# Altium PCB Hydrophone_preamplifier_V2.PcbDoc
Units mil, origin at the board's own origin, x right, y up, seen from the top; angles counter-clockwise.
Board outline 2834.65 x 2755.91 mil, 2 copper layers (Top Layer, Bottom Layer); 118 components, 68 nets, 314 pads, 274 vias.
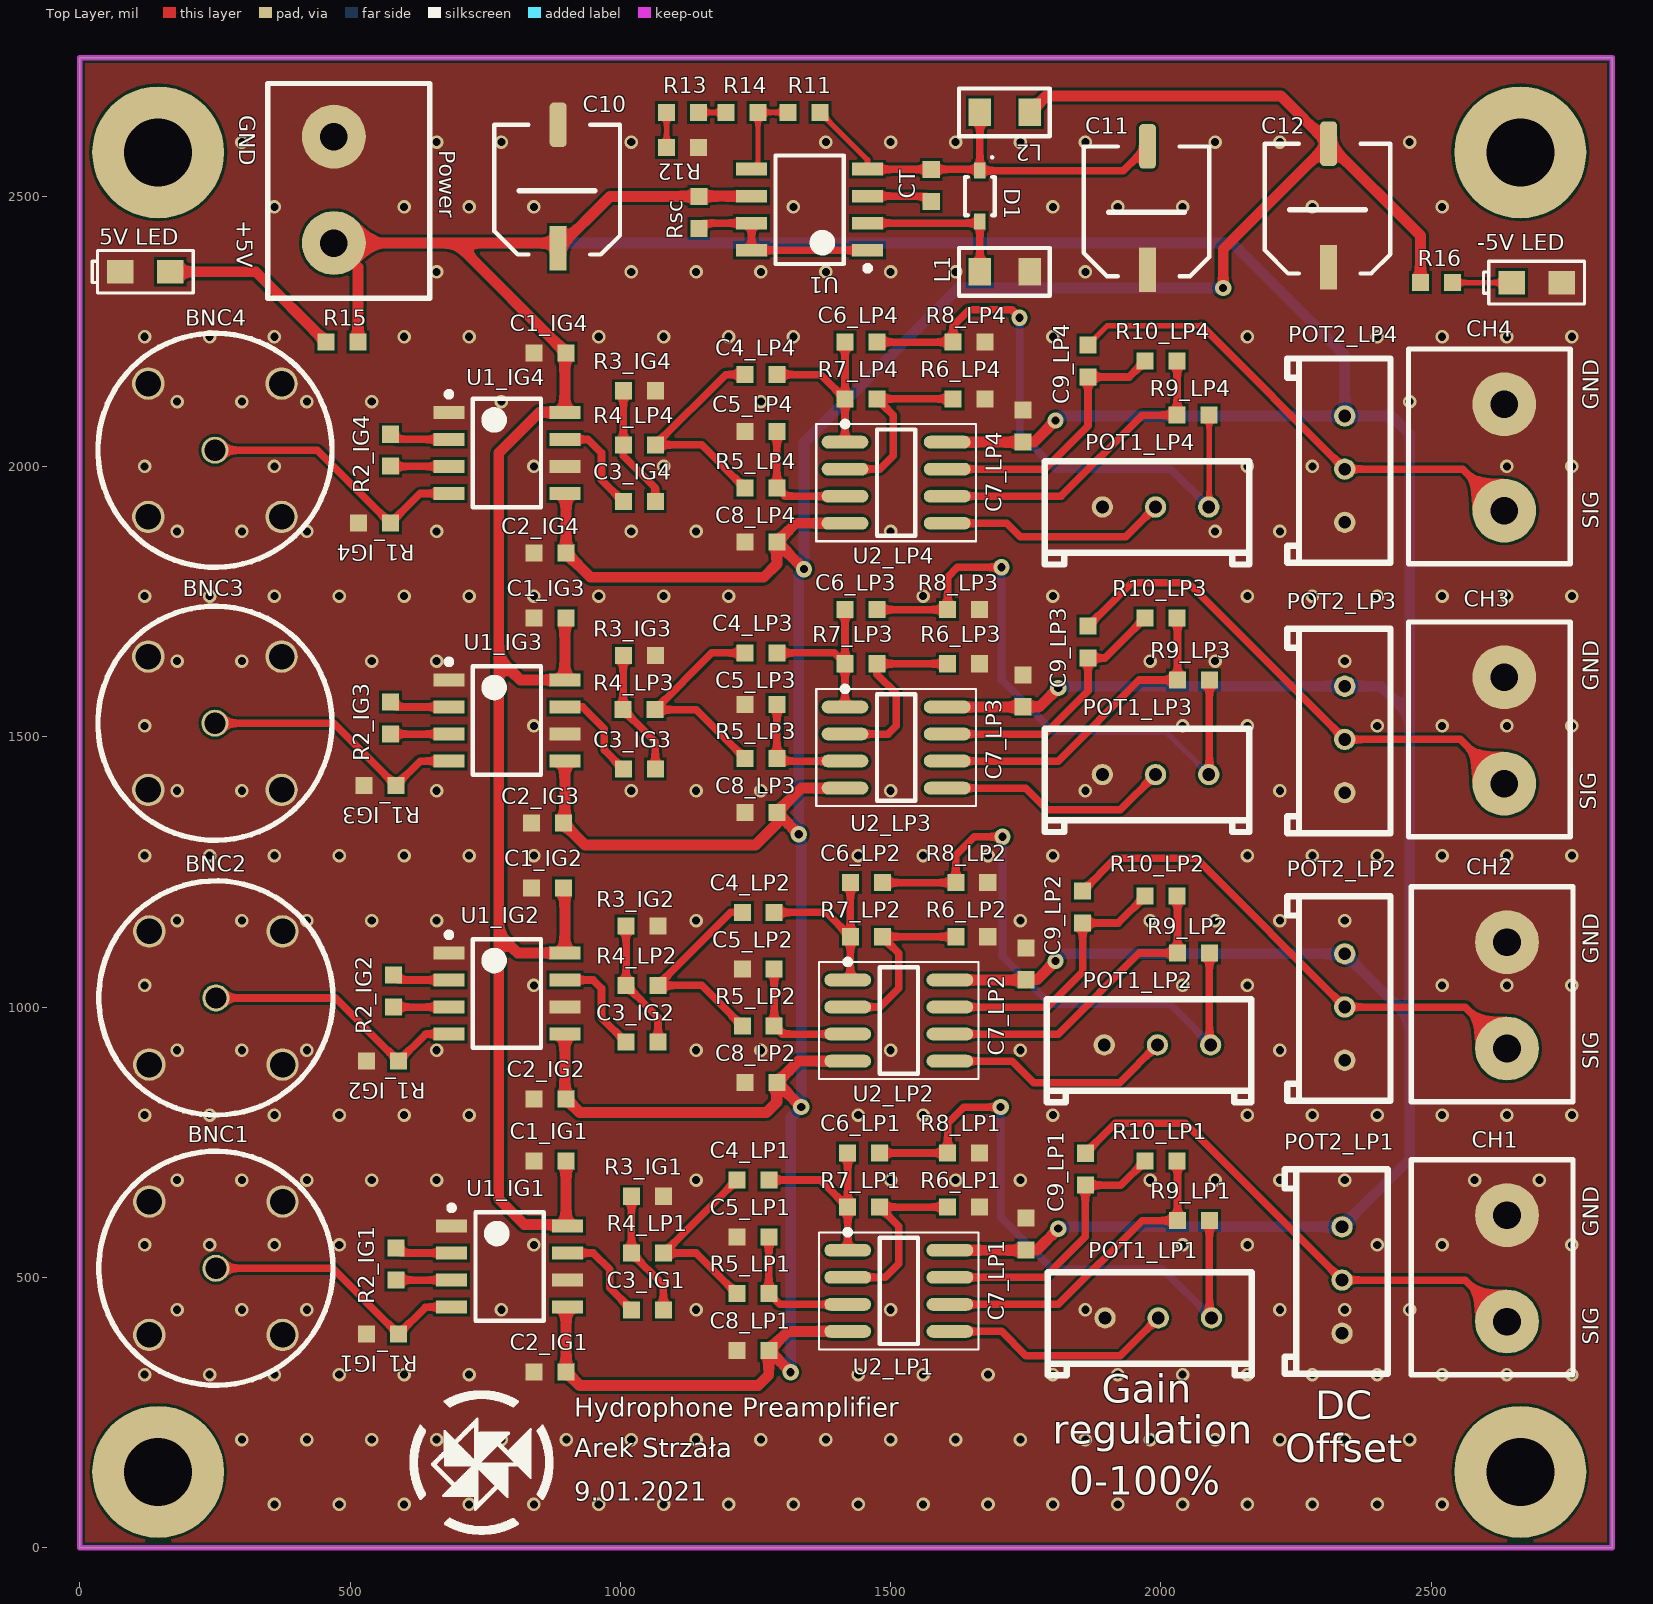
[diagram p0: Top Layer view]
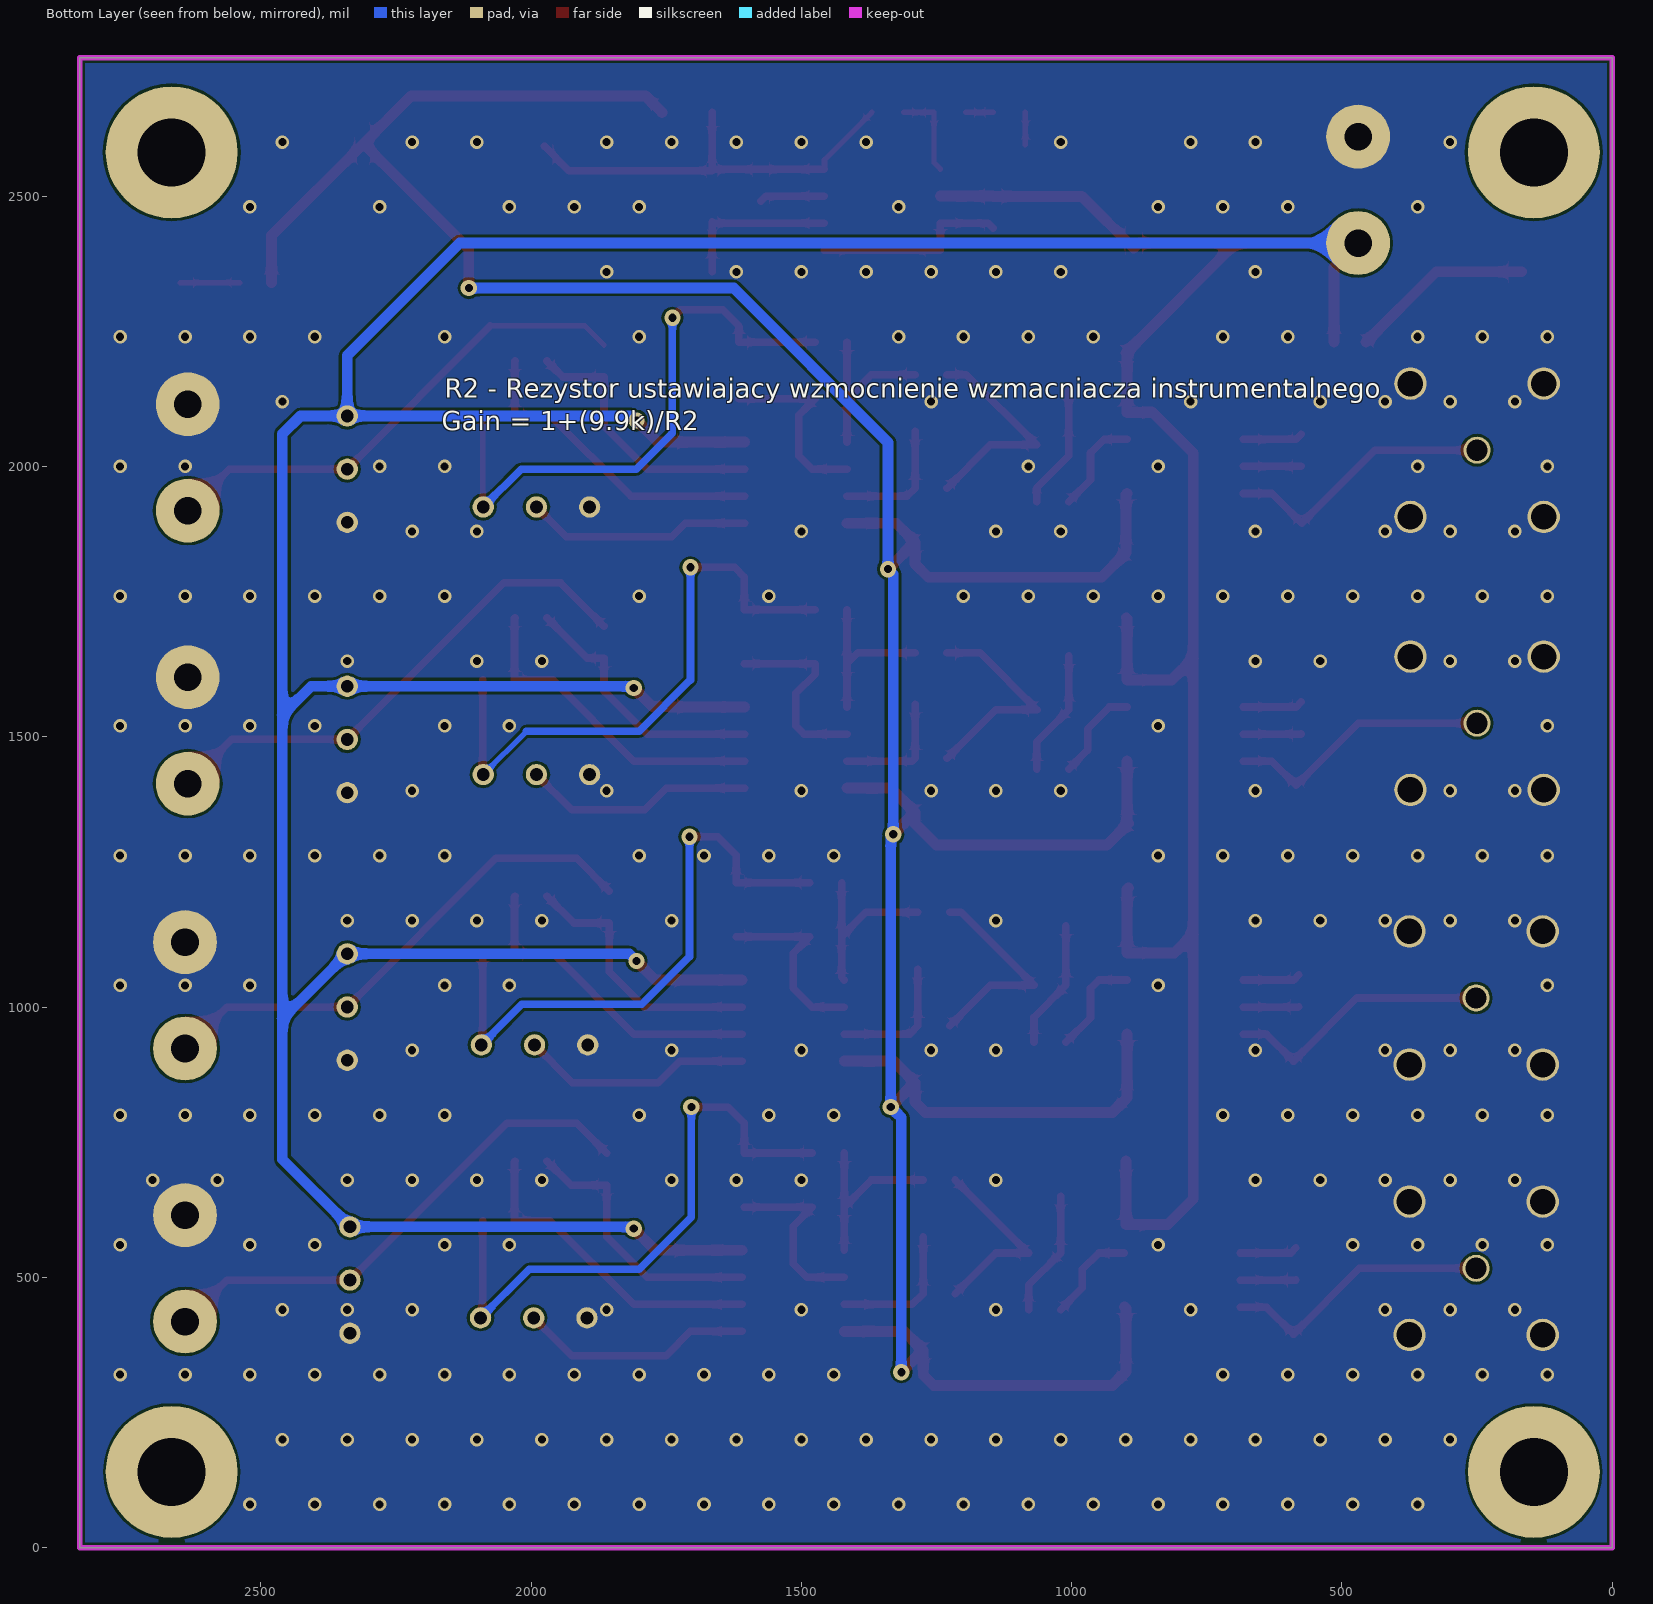
[diagram p1: Bottom Layer view, seen from below]
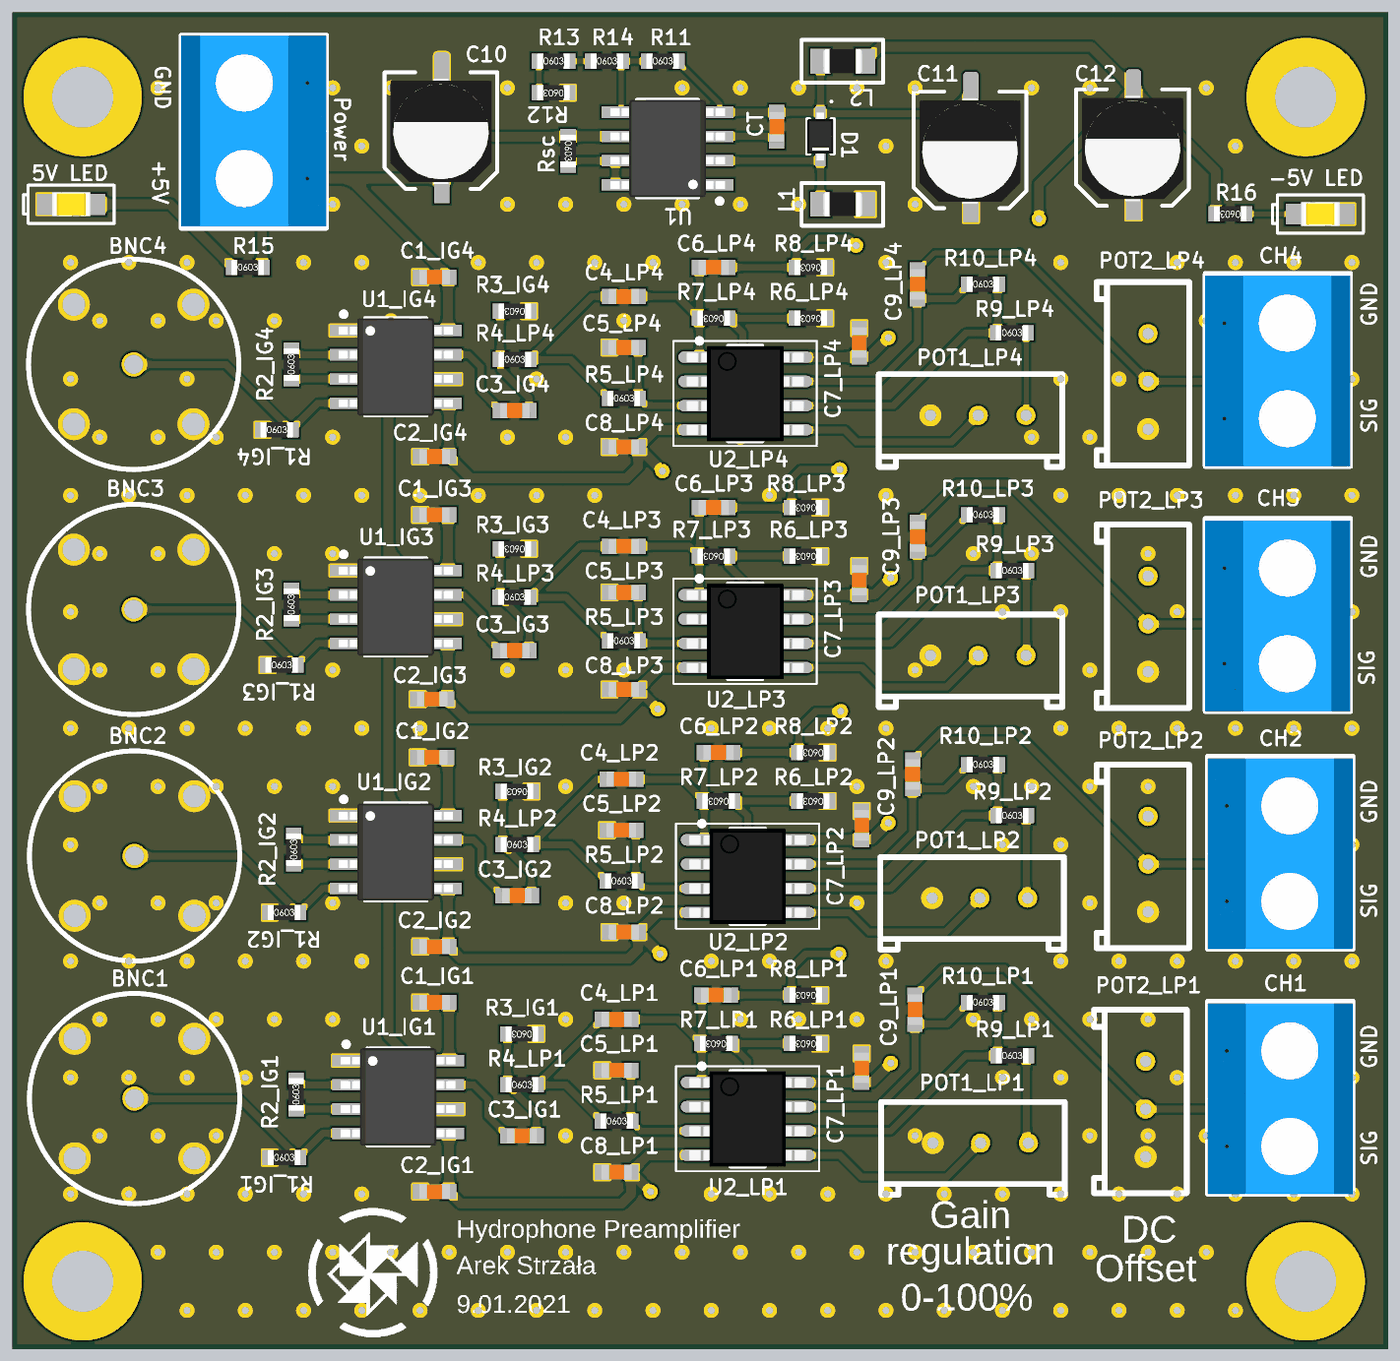
[diagram p2: 3D render of the assembled board from above, using the file's embedded part models]

## Layer stack, top to bottom
Top Solder: solder mask 0.4, Solder Resist, Dk 3.5
Top Layer: signal copper 1.4
Dielectric 1: dielectric 12.6, FR-4, Dk 4.8
Bottom Layer: signal copper 1.4
Bottom Solder: solder mask 0.4, Solder Resist, Dk 3.5

## Board outline
0,0 0,2755.91 2834.65,2755.91 2834.65,0

## Design rules (kind name [scope] priority, off if disabled: settings)
BoardOutlineClearance [All] p1: gap=7.87 ignorepadtopadclearanceinfootprint=FALSE
Clearance [All] p1: gap=5 ignorepadtopadclearanceinfootprint=FALSE except(9.84: Arc-Hole Track-Hole SMDPad-Hole THPad-Hole Via-Hole Fill-Hole Poly-Hole Region-Hole Text-Hole)
ComponentClearance [All] p1: gap=5 collisioncheckmode=3 verticalgap=5 showdistances=TRUE
DiffPairsRouting [All] p1: maxlimit=10 minlimit=5 mostfreqgap=5 toplayer_minwidth=5 toplayer_maxwidth=1000 toplayer_prefwidth=5 bottomlayer_minwidth=5 bottomlayer_maxwidth=1000 bottomlayer_prefwidth=5 maxuncoupledlength=500
Height [All] p1: minheight=0 maxheight=71497.94 prefheight=500
HoleSize [All] p1: absolutevalues=TRUE maxlimit=248.03 minlimit=11.81 maxpercent=80.000 minpercent=20.000
HoleToHoleClearance [All] p1: gap=9.84 allowstackedmicrovias=FALSE
MinimumAnnularRing [All] p1: minimumring=3
MinimumSolderMaskSliver [All] p1: minsoldermaskwidth=0
PlaneClearance [All] p1: clearance=5
PlaneConnect PlaneConnectPowerPads [InPadClass('PowerPads')] p1: planeconnectstyle=Direct reliefexpansion=20 reliefentries=4 reliefconductorwidth=10 reliefairgap=10
PlaneConnect [All] p2: pad.planeconnectstyle=Relief pad.reliefexpansion=11.81 pad.reliefentries=4 pad.reliefconductorwidth=5 pad.reliefairgap=5 via.planeconnectstyle=Direct via.reliefexpansion=11.81 via.reliefentries=4 via.reliefconductorwidth=5 via.reliefairgap=5
PolygonConnect "direct connect" [All vs IsNamedPolygon('GND_L02_P008')] p1: connectstyle=Direct reliefconductorwidth=10 reliefentries=4 polygonreliefangle="90 Angle" airgapwidth=10
PolygonConnect "direct contact_3" [All vs IsNamedPolygon('GND_L01_P007')] p2: connectstyle=Direct reliefconductorwidth=10 reliefentries=4 polygonreliefangle="90 Angle" airgapwidth=10
PolygonConnect "direct contact_2" [All vs IsNamedPolygon('TOP Layer-GND1')] p3: connectstyle=Direct reliefconductorwidth=10 reliefentries=4 polygonreliefangle="90 Angle" airgapwidth=10
PolygonConnect "direct contact_1" [All vs IsNamedPolygon('TOP Layer-GND1')] p4: thpad.connectstyle=NoConnect thpad.reliefconductorwidth=10 thpad.reliefentries=4 thpad.polygonreliefangle="90 Angle" thpad.airgapwidth=10 smdpad.connectstyle=Direct smdpad.reliefconductorwidth=10 smdpad.reliefentries=4 smdpad.polygonreliefangle="90 Angle" smdpad.airgapwidth=10 via.connectstyle=Direct via.reliefconductorwidth=10 via.reliefentries=4 via.polygonreliefangle="90 Angle" via.airgapwidth=10
PolygonConnect "direct contact" [All vs IsNamedPolygon('Bottom Layer-GND')] p5: connectstyle=Direct reliefconductorwidth=10 reliefentries=4 polygonreliefangle="90 Angle" airgapwidth=10
PolygonConnect PolygonConnectPowerPads [All vs (InPadClass('PowerPads'))] p6: connectstyle=Direct reliefconductorwidth=10 reliefentries=4 polygonreliefangle="90 Angle" airgapwidth=10
PolygonConnect [All] p7: thpad.connectstyle=Relief thpad.reliefconductorwidth=5 thpad.reliefentries=4 thpad.polygonreliefangle="90 Angle" thpad.airgapwidth=5 smdpad.connectstyle=Relief smdpad.reliefconductorwidth=5 smdpad.reliefentries=4 smdpad.polygonreliefangle="90 Angle" smdpad.airgapwidth=5 via.connectstyle=Direct via.reliefconductorwidth=5 via.reliefentries=4 via.polygonreliefangle="90 Angle" via.airgapwidth=5
RoutingVias [All] p1: holewidth=11.81 width=23.62 viastyle="Through Hole" minholewidth=11.81 minwidth=23.62 maxholewidth=23.62 maxwidth=259.84
SilkToSilkClearance [All] p1: silktosilkclearance=0
SilkToSolderMaskClearance [IsPad] p1: minsilkscreentomaskgap=5 clearancetoexposedcopper=TRUE
SolderMaskExpansion [All] p1: expansion=2.95
Width [All] p1: maxlimit=1000 minlimit=5 preferedwidth=5 minimp=50.000000 maximp=50.000000 favimp=50.000000
20 further rules are at their usual default settings.

## Classes and differential pairs
channel class Low_Pass_48kHz: LP1 LP2 LP3 LP4
channel class Input_Gain: IG1 IG2 IG3 IG4
channel class Channel: preamp1 preamp2 preamp3 preamp4
component class "Symetric power": "5V LED" "-5V LED" C10 C11 C12 CT D1 L1 L2 R11 R12 R13 R14 R15 R16 Rsc U1
component class LP4: C4_LP4 C5_LP4 C6_LP4 C7_LP4 C8_LP4 C9_LP4 POT1_LP4 POT2_LP4 R4_LP4 R5_LP4 R6_LP4 R7_LP4 R8_LP4 R9_LP4 R10_LP4 U2_LP4
component class LP3: C4_LP3 C5_LP3 C6_LP3 C7_LP3 C8_LP3 C9_LP3 POT1_LP3 POT2_LP3 R4_LP3 R5_LP3 R6_LP3 R7_LP3 R8_LP3 R9_LP3 R10_LP3 U2_LP3
component class LP2: C4_LP2 C5_LP2 C6_LP2 C7_LP2 C8_LP2 C9_LP2 POT1_LP2 POT2_LP2 R4_LP2 R5_LP2 R6_LP2 R7_LP2 R8_LP2 R9_LP2 R10_LP2 U2_LP2
component class LP1: C4_LP1 C5_LP1 C6_LP1 C7_LP1 C8_LP1 C9_LP1 POT1_LP1 POT2_LP1 R4_LP1 R5_LP1 R6_LP1 R7_LP1 R8_LP1 R9_LP1 R10_LP1 U2_LP1
component class IG4: C1_IG4 C2_IG4 C3_IG4 R1_IG4 R2_IG4 R3_IG4 U1_IG4
component class IG3: C1_IG3 C2_IG3 C3_IG3 R1_IG3 R2_IG3 R3_IG3 U1_IG3
component class IG2: C1_IG2 C2_IG2 C3_IG2 R1_IG2 R2_IG2 R3_IG2 U1_IG2
component class IG1: C1_IG1 C2_IG1 C3_IG1 R1_IG1 R2_IG1 R3_IG1 U1_IG1
component class Hydrophone_preamp_Main_schematic: BNC1 BNC2 BNC3 BNC4 CH1 CH2 CH3 CH4 Power

## Components (designator, comment, footprint, x,y, rotation, side; value= is the part's Value field where it differs from the comment)
"5V LED" "RED" 0805_led_yellow 121.26,2360 r180 top
"-5V LED" "RED" 0805_led_yellow 2695,2340 r180 top
BNC1 "Hydrophone1" BNC 251.77,516.77 r0 top
BNC2 "Hydrophone2" BNC 251.77,1016.77 r0 top
BNC3 "Hydrophone3" BNC 250,1525 r0 top
BNC4 "Hydrophone4" BNC 250,2030 r0 top
C1_IG1 "Cap" CAPC0603M 870,715 r0 top value=100nF (schematic designator C1)
C1_IG2 "Cap" CAPC0603M 865,1220 r0 top value=100nF (schematic designator C1)
C1_IG3 "Cap" CAPC0603M 869.53,1720 r0 top value=100nF (schematic designator C1)
C1_IG4 "Cap" CAPC0603M 870,2210 r0 top value=100nF (schematic designator C1)
C2_IG1 "Cap" CAPC0603M 870,325 r180 top value=100nF (schematic designator C2)
C2_IG2 "Cap" CAPC0603M 870,830 r180 top value=100nF (schematic designator C2)
C2_IG3 "Cap" CAPC0603M 865,1340 r180 top value=100nF (schematic designator C2)
C2_IG4 "Cap" CAPC0603M 870,1840 r180 top value=100nF (schematic designator C2)
C3_IG1 "Cap" CAPC0603M 1050,440 r0 top value=10uF (schematic designator C3)
C3_IG2 "Cap" CAPC0603M 1040,935 r0 top value=10uF (schematic designator C3)
C3_IG3 "Cap" CAPC0603M 1035,1440 r0 top value=10uF (schematic designator C3)
C3_IG4 "Cap" CAPC0603M 1035,1935 r0 top value=10uF (schematic designator C3)
C4_LP1 "Cap" CAPC0603M 1245,680 r180 top value=1.5nF (schematic designator C4)
C4_LP2 "Cap" CAPC0603M 1255,1175 r180 top value=1.5nF (schematic designator C4)
C4_LP3 "Cap" CAPC0603M 1260,1655 r180 top value=1.5nF (schematic designator C4)
C4_LP4 "Cap" CAPC0603M 1260,2170 r180 top value=1.5nF (schematic designator C4)
C5_LP1 "Cap" CAPC0603M 1245,575 r0 top value=1.5nF (schematic designator C5)
C5_LP2 "Cap" CAPC0603M 1255,1070 r0 top value=1.5nF (schematic designator C5)
C5_LP3 "Cap" CAPC0603M 1260,1560 r0 top value=1.5nF (schematic designator C5)
C5_LP4 "Cap" CAPC0603M 1260,2065 r0 top value=1.5nF (schematic designator C5)
C6_LP1 "Cap" CAPC0603M 1450,730 r180 top value=1uF (schematic designator C6)
C6_LP2 "Cap" CAPC0603M 1455,1230 r180 top value=1uF (schematic designator C6)
C6_LP3 "Cap" CAPC0603M 1445,1735 r180 top value=1uF (schematic designator C6)
C6_LP4 "Cap" CAPC0603M 1445,2230 r180 top value=1uF (schematic designator C6)
C7_LP1 "Cap" CAPC0603M 1750,580 r90 top value=100nF (schematic designator C7)
C7_LP2 "Cap" CAPC0603M 1750,1080 r90 top value=100nF (schematic designator C7)
C7_LP3 "Cap" CAPC0603M 1745,1585 r90 top value=100nF (schematic designator C7)
C7_LP4 "Cap" CAPC0603M 1745,2075 r90 top value=100nF (schematic designator C7)
C8_LP1 "Cap" CAPC0603M 1245,365 r180 top value=100nF (schematic designator C8)
C8_LP2 "Cap" CAPC0603M 1260,860 r180 top value=100nF (schematic designator C8)
C8_LP3 "Cap" CAPC0603M 1260,1360 r180 top value=100nF (schematic designator C8)
C8_LP4 "Cap" CAPC0603M 1260,1860 r180 top value=100nF (schematic designator C8)
C9_LP1 "Cap" CAPC0603M 1860,700 r270 top value=10uF (schematic designator C9)
C9_LP2 "Cap" CAPC0603M 1855,1185 r270 top value=10uF (schematic designator C9)
C9_LP3 "Cap" CAPC0603M 1865,1675 r270 top value=10uF (schematic designator C9)
C9_LP4 "Cap" CAPC0603M 1865,2195 r270 top value=10uF (schematic designator C9)
C10 "100uF" Con_SMD_5x5.5 885,2510 r180 top
C11 "1000uF" Con_SMD_5x5.5 1975,2470 r180 top
C12 "100uF" Con_SMD_5x5.5 2310,2475 r180 top
CH1 "ARK2" ARK2 2762.05,319.72 r90 top
CH2 "ARK2" ARK2 2762.05,824.72 r90 top
CH3 "ARK2" ARK2 2757.05,1314.72 r90 top
CH4 "ARK2" ARK2 2757.05,1819.72 r90 top
CT "Cap" CAPC0603M 1575,2519.99 r90 top value=470pF
D1 "D Schottky" SOD323F 1665,2499.99 r270 top
L1 "100uH" 0805_IND 1665,2360 r0 top value=10uH
L2 "1uH" 0805_IND 1665,2654.99 r0 top value=10uH
POT1_LP1 "Potentiometer" Pot_3296 1995,425 r180 top (schematic designator POT1)
POT1_LP2 "Potentiometer" Pot_3296 1993.43,930 r180 top (schematic designator POT1)
POT1_LP3 "Potentiometer" Pot_3296 1990,1430 r180 top (schematic designator POT1)
POT1_LP4 "Potentiometer" Pot_3296 1990,1925 r180 top (schematic designator POT1)
POT2_LP1 "Potentiometer" Pot_3296 2335,495 r90 top (schematic designator POT2)
POT2_LP2 "Potentiometer" Pot_3296 2340,1000 r90 top (schematic designator POT2)
POT2_LP3 "Potentiometer" Pot_3296 2340,1495 r90 top (schematic designator POT2)
POT2_LP4 "Potentiometer" Pot_3296 2340,1995 r90 top (schematic designator POT2)
Power "ARK2" ARK2 347.95,2708.43 r270 top
R1_IG1 "10M" RESC0603 560,395 r0 top (schematic designator R1)
R1_IG2 "10M" RESC0603 560,900 r0 top (schematic designator R1)
R1_IG3 "10M" RESC0603 555,1410 r0 top (schematic designator R1)
R1_IG4 "10M" RESC0603 545,1895 r0 top (schematic designator R1)
R2_IG1 "47" RESC0603 585,525 r90 top (schematic designator R2)
R2_IG2 "47" RESC0603 580,1030 r90 top (schematic designator R2)
R2_IG3 "47" RESC0603 575,1535 r90 top (schematic designator R2)
R2_IG4 "47" RESC0603 575,2030 r90 top (schematic designator R2)
R3_IG1 "20k" RESC0603 1050,650 r180 top (schematic designator R3)
R3_IG2 "20k" RESC0603 1040,1150 r180 top (schematic designator R3)
R3_IG3 "20k" RESC0603 1035,1650 r180 top (schematic designator R3)
R3_IG4 "20k" RESC0603 1035,2140 r180 top (schematic designator R3)
R4_LP1 "3.3k" RESC0603 1050,545 r0 top (schematic designator R4)
R4_LP2 "3.3k" RESC0603 1040,1040 r0 top (schematic designator R4)
R4_LP3 "3.3k" RESC0603 1034.53,1550 r0 top (schematic designator R4)
R4_LP4 "3.3k" RESC0603 1035,2040 r0 top (schematic designator R4)
R5_LP1 "3.3k" RESC0603 1245,470 r0 top (schematic designator R5)
R5_LP2 "3.3k" RESC0603 1255,965 r0 top (schematic designator R5)
R5_LP3 "3.3k" RESC0603 1260,1460 r0 top (schematic designator R5)
R5_LP4 "3.3k" RESC0603 1260,1960 r0 top (schematic designator R5)
R6_LP1 "1k" RESC0603 1635,630 r180 top (schematic designator R6)
R6_LP2 "1k" RESC0603 1650,1130 r180 top (schematic designator R6)
R6_LP3 "1k" RESC0603 1635,1635 r180 top (schematic designator R6)
R6_LP4 "1k" RESC0603 1645,2125 r180 top (schematic designator R6)
R7_LP1 "1k" RESC0603 1450,630 r180 top (schematic designator R7)
R7_LP2 "1k" RESC0603 1455,1130 r180 top (schematic designator R7)
R7_LP3 "1k" RESC0603 1445,1635 r180 top (schematic designator R7)
R7_LP4 "1k" RESC0603 1445,2125 r180 top (schematic designator R7)
R8_LP1 "20k" RESC0603 1635,730 r180 top (schematic designator R8)
R8_LP2 "20k" RESC0603 1650,1230 r180 top (schematic designator R8)
R8_LP3 "20k" RESC0603 1635,1735 r180 top (schematic designator R8)
R8_LP4 "20k" RESC0603 1645,2230 r180 top (schematic designator R8)
R9_LP1 "2k2" RESC0603 2060,605 r0 top (schematic designator R9)
R9_LP2 "2k2" RESC0603 2060,1100 r0 top (schematic designator R9)
R9_LP3 "2k2" RESC0603 2060,1605 r0 top (schematic designator R9)
R9_LP4 "2k2" RESC0603 2059.53,2095 r0 top (schematic designator R9)
R10_LP1 "20k" RESC0603 2000,715 r0 top (schematic designator R10)
R10_LP2 "20k" RESC0603 2000,1205 r0 top (schematic designator R10)
R10_LP3 "20k" RESC0603 2000,1720 r0 top (schematic designator R10)
R10_LP4 "20k" RESC0603 2000,2195 r0 top (schematic designator R10)
R11 "10k" RESC0603 1340,2655 r0 top
R12 "10k" RESC0603 1115,2590 r180 top
R13 "10k" RESC0603 1115,2655 r0 top
R14 "10k" RESC0603 1225,2655 r0 top
R15 "470" RESC0603 485,2230 r0 top
R16 "470" RESC0603 2509.53,2340 r180 top
Rsc "0.22" RESC0603 1145,2470 r270 top
U1 "AZ34063UMTR-G1" SOIC127P600X175-8N 1350,2474.99 r180 top
U1_IG1 "AD8421" SOIC127P600X175-8N 795,520 r0 top (schematic designator U1)
U1_IG2 "AD8421" SOIC127P600X175-8N 790,1025 r0 top (schematic designator U1)
U1_IG3 "AD8421" SOIC127P600X175-8N 790,1530 r0 top (schematic designator U1)
U1_IG4 "AD8421" SOIC127P600X175-8N 790,2025 r0 top (schematic designator U1)
U2_LP1 "LM358AD" SO-8_N 1515,475 r0 top (schematic designator U2)
U2_LP2 "LM358AD" SO-8_N 1515,975 r0 top (schematic designator U2)
U2_LP3 "LM358AD" SO-8_N 1510,1480 r0 top (schematic designator U2)
U2_LP4 "LM358AD" SO-8_N 1510,1970 r0 top (schematic designator U2)

## Footprints (in the part's own frame and the unit in brackets; to place one, negate y for a bottom-side part, rotate by r counter-clockwise, add the part's x,y. Pads: shape width x height; smd on the part's side, far side on the other; paste and mask are expansions set on the pad)
0805_IND [mm] "(2012 metric)"
  rect 1.05x1.3 smd: 1(0,0) 2(2.35,0)
  silkscreen extent -0.98,-1.12 3.28,1.12, body extent 0.15,-0.64 2.17,0.64, height 0.81
0805_led_yellow [mm]
  rect 1.25x1.1 smd: 1(-1.175,0) 2(1.175,0)
  silkscreen extent -2.25,-1 2.5,1, body extent -1,-0.62 1,0.63, height 0.6
ARK2 [mm]
  round 3 hole 1.3: 1(2.5,3.1) 2(7.5,3.1)
  silkscreen extent 0,0 10.1,7.6, body extent 0,0 10,7.6, height 10
BNC [mm] "gniazdo BNC"
  round 1.524 hole 1.2: 1(-3.13,-3.13) 1(-3.13,3.13) 1(3.13,-3.13) 1(3.13,3.13)
  round 1.27 hole 1: 2(0,0)
  silkscreen extent -5.5,-5.5 5.5,5.5, body extent -3.05,0 1.14,5.84, height 7
CAPC0603M [mm] "Chip Capacitor, 2-Leads, Body 1,60x0,80mm, IPC High Density"
  rect 0.8x0.8 smd: 1(-0.75,0) 2(0.75,0)
  body extent -0.8,-0.4 0.8,0.4, height 0.5
Con_SMD_5x5.5 [mm] "SMD electrolytic capacitor"
  rect 0.8x2.1 smd: 1(0,2.7)
  rrect50% 0.8x2.1 smd: 2(0,-3.1)
  silkscreen extent -2.9,-3.1 3,3, body extent -2.6,-2.76 2.7,2.76, height 5.81
Pot_3296 [mm] "Bochen 3296 Pin2 - Wiper"
  rrect100% 1x1 hole 0.6: 1(2.5,0) 2(0,0) 3(-2.5,0)
  silkscreen extent -4.4,-2.15 5.2,2.7, body extent -4.4,-2.1 5.2,2.7, height 16
RESC0603 [mm] "Chip Resistor, 2-Leads, Body 1,57x0,80mm, IPC High Density"
  rect 0.8x0.8 smd: 1(-0.75,0) 2(0.75,0)
  body extent -0.85,-0.4 0.85,0.4, height 0.56
SO-8_N [mm]
  oval 2.2x0.6 smd: 1(-2.4,1.905) 2(-2.4,0.635) 3(-2.4,-0.635) 4(-2.4,-1.905) 5(2.4,-1.905) 6(2.4,-0.635) 7(2.4,0.635) 8(2.4,1.905)
  silkscreen extent -3.75,-2.75 3.75,2.88, body extent -3.1,-2.51 3.1,2.49, height 1.75
SOD323F [mm] "SODFL, 2-Leads, Body 1,25x2,50mm, IPC High Density"
  rect 0.75x0.55 smd: 1(-1.2,0) 2(1.2,0)
  silkscreen extent -1.87,-0.7 0.9,0.7, body extent -1.25,-0.68 1.25,0.67, height 1
SOIC127P600X175-8N [mm] "SOIC, 8-Leads, Body 4,90x3,90mm, Pitch 1,27mm, IPC Medium Density"
  rect 1.45x0.6 smd: 1(-2.725,1.905) 2(-2.725,0.635) 3(-2.725,-0.635) 4(-2.725,-1.905) 5(2.725,-1.905) 6(2.725,-0.635) 7(2.725,0.635) 8(2.725,1.905)
  silkscreen extent -2.85,-2.55 1.6,2.88, body extent -3,-2.55 3,2.55, height 1.75

## Part data
"5V LED" "-5V LED": library part LED, "Light-emitting diode", COLOR=RED
BNC1 BNC2 BNC3 BNC4: library part "BNC gniazdo", ComponentLink1Description=TME, ComponentLink1URL=https://www.tme.eu/pl/details/5-1634503-1/zlacza-bnc/te-connectivity/, ComponentLink2Description=datasheet, ComponentLink2URL=https://www.tme.eu/Document/98c590ab217976accc479c0d40976d37/5-1634503-1.pdf
C1_IG1 C1_IG2 C1_IG3 C1_IG4 C2_IG1 C2_IG2 C2_IG3 C2_IG4 C3_IG1 C3_IG2 C3_IG3 C3_IG4 C4_LP1 C4_LP2 C4_LP3 C4_LP4 C5_LP1 C5_LP2 C5_LP3 C5_LP4 C6_LP1 C6_LP2 C6_LP3 C6_LP4 C7_LP1 C7_LP2 C7_LP3 C7_LP4 C8_LP1 C8_LP2 C8_LP3 C8_LP4 C9_LP1 C9_LP2 C9_LP3 C9_LP4 CT: "Ceramic capacitor"
C10 C11 C12: library part Cap_Pol, "Polar capacitor"
CH1 CH2 CH3 CH4 Power: "Złącze śrubowe 2 piny"
D1: "Schottky Diode", Code_JEDEC=DO-214-AA, LatestRevisionDate=17-Jul-2002, LatestRevisionNote="Re-released for DXP Platform.", PackageDescription="DO-214-AA/SMB; 2 C-Bend Leads; Body 5.3 x 3.6 mm, inc. leads (LxW)", PackageReference=SMB, Published=8-Jun-2000, Publisher="Altium Limited"
L1 L2: library part Inductor, Code_IEC=1005, Code_JEITA=0402, LatestRevisionDate=29-May-2009, LatestRevisionNote="IPC-7351 Footprint Added.", PackageDescription="Chip Inductor", PackageReference=0402-A, Published=8-Jun-2000, Publisher="Altium Limited"
R1_IG1 R1_IG2 R1_IG3 R1_IG4 R2_IG1 R2_IG2 R2_IG3 R2_IG4 R3_IG1 R3_IG2 R3_IG3 R3_IG4 R4_LP1 R4_LP2 R4_LP3 R4_LP4 R5_LP1 R5_LP2 R5_LP3 R5_LP4 R6_LP1 R6_LP2 R6_LP3 R6_LP4 R7_LP1 R7_LP2 R7_LP3 R7_LP4 R8_LP1 R8_LP2 R8_LP3 R8_LP4 R9_LP1 R9_LP2 R9_LP3 R9_LP4 R10_LP1 R10_LP2 R10_LP3 R10_LP4 R11 R12 R13 R14 R15 R16 Rsc: library part RES, "Resistior"
U1_IG1 U1_IG2 U1_IG3 U1_IG4: "10MHz    +-2.5-18V  Instrumentation Amplifier", ComponentLink1Description=datasheet, ComponentLink1URL=https://www.tme.eu/Document/c72dc595607ee32045c3f9fad3f223f3/AD8421.pdf, ComponentLink2Description=TME, ComponentLink2URL=https://www.tme.eu/pl/details/ad8421arz/wzmacniacze-operacyjne-smd/analog-devices/
U2_LP1 U2_LP2 U2_LP3 U2_LP4: "Low-Power Dual Operational Amplifier", Code_IPC=SOIC127P600-8, Code_JEDEC=MS-012-AA, ComponentLink1Description="Manufacturer Link", ComponentLink1URL=http://www.st.com/, ComponentLink2Description=Datasheet, ComponentLink2URL=http://www.st.com/stonline/products/literature/ds/2163/lm358.pdf, DatasheetVersion=Jun-1998, LatestRevisionDate=13-Apr-2006, LatestRevisionNote="IPC-7351 Footprint Added.", PackageDescription="8-Pin Small Outline Integrated Circuit 1.27 mm Pitch", PackageReference=SO8, PackageVersion=Dec-2002, Published=24-Aug-2001, Publisher="Altium Limited"
U1: ComponentLink1Description=datasheet, ComponentLink1URL=https://www.tme.eu/Document/f583ca1a85dfa98789e5757031039545/AZ34063U.pdf, ComponentLink2Description=TME, ComponentLink2URL=https://www.tme.eu/pl/details/az34063umtr-g1/regulatory-napiecia-uklady-dc-dc/diodes-incorporated/

## Free pads (board coordinates)
  round 244.09 hole 125.98: 3(145,140) 6(145,2580.94) 6(2664.69,140) 6(2664.69,2580.94)

## Via types
v1: diameter 25, hole 15, Top Layer to Bottom Layer, 261 vias
v2: diameter 30, hole 15, Top Layer to Bottom Layer, 13 vias

## Nets (pads, with @x,y where several pads share a name; then routed paths per layer and width w, separated by ;. In a path a pad name is that pad's centre, name@x,y a point inside that pad or via, vN(x,y) a via of type N, cw(c..) or ccw(c..) an arc to the next point about the centre after c; other vN are vias at no path point)
+5: C1_IG1.2 C1_IG2.2 C1_IG3.2 C1_IG4.2 C7_LP1.1 C7_LP2.1 C7_LP3.1 C7_LP4.1 C10.1 POT2_LP1.1 POT2_LP2.1 POT2_LP3.1 POT2_LP4.1 Power.2 R15.2 Rsc.1 U1.6 U1_IG1.8 U1_IG2.8 U1_IG3.8 U1_IG4.8 U2_LP1.8 U2_LP2.8 U2_LP3.8 U2_LP4.8 | length 10756.4
  Top Layer w20: R15.2 514.53,2368.62 Power.2 696.38,2413.15 ; C1_IG2.2 897.28,1217.24 U1_IG2.8 810,1100 775,1135 ; C1_IG3.2 897.28,1718.23 U1_IG3.8 815,1605 775,1645 ; C1_IG1.2 899.53,597.76 822.24,597.76 775,645 775,1135 ; U1.6 1145.46,2499.99 Rsc.1 980.83,2499.53 C10.1 875.55,2413.15 696.38,2413.15 ; U2_LP3.8 1744.53,1555 C7_LP3.1 1775.47,1555.47 v2(1810,1590) ; U2_LP4.8 1744.53,2045 C7_LP4.1 1765.47,2045.47 v2(1805,2085) ; U2_LP1.8 1749.53,550 C7_LP1.1 1770.47,550.47 v2(1810,590) ; U2_LP2.8 1749.53,1050 C7_LP2.1 1770.47,1050.47 v2(1805,1085) ; 696.38,2413.15 C1_IG4.2 897.28,2207.76 U1_IG4.8 850,2100 775,2025 775,1645 ; 775,1135 775,1645
  Bottom Layer w20: Power.2 2131.85,2413.15 2340,2205 POT2_LP4.1 ; v2(1805,1085) 1818.43,1098.43 POT2_LP2.1 2460,978.43 ; v2(1805,2085) 1813.43,2093.43 POT2_LP4.1 ; v2(1810,590) 1813.43,593.43 POT2_LP1.1 2460,718.43 2460,978.43 ; v2(1810,1590) 1813.43,1593.43 POT2_LP3.1 2406.57,1593.43 2460,1540 ; POT2_LP4.1 2426.57,2093.43 2460,2060 2460,1540 ; 2460,978.43 2460,1540
-5: C2_IG1.1 C2_IG2.1 C2_IG3.1 C2_IG4.1 C8_LP1.1 C8_LP2.1 C8_LP3.1 C8_LP4.1 C12.2 L2.2 R16.2 U1_IG1.5 U1_IG2.5 U1_IG3.5 U1_IG4.5 U2_LP1.4 U2_LP2.4 U2_LP3.4 U2_LP4.4 | length 7005.9
  Top Layer w20: U1_IG2.5 897.28,832.24 C2_IG2.1 924.53,805 1270,805 1289.53,824.53 C8_LP2.1 ; U1_IG3.5 897.28,1342.76 C2_IG3.1 934.53,1300 1250,1300 1289.53,1339.53 C8_LP3.1 ; U1_IG4.5 899.53,1947.76 C2_IG4.1 944.53,1795 1265,1795 1289.53,1819.53 C8_LP4.1 ; U1_IG1.5 899.53,442.24 C2_IG1.1 924.53,300 1255,300 1274.53,319.53 C8_LP1.1 ; v2(1315,324.53) C8_LP1.1 ; v2(1330,1319.53) C8_LP3.1 ; v2(1334.53,815) C8_LP2.1 ; v2(1339.53,1810) C8_LP4.1 ; U2_LP3.4 1334.53,1405 C8_LP3.1 ; U2_LP4.4 1324.53,1895 C8_LP4.1 ; U2_LP1.4 1309.53,400 C8_LP1.1 ; U2_LP2.4 1329.53,900 C8_LP2.1 ; L2.2 1787.53,2685 2222.05,2685 C12.2 ; v2(2115,2330) 2115,2402.05 C12.2 ; R16.2 2480,2427.05 C12.2
  Bottom Layer w20: v2(1315,324.53) 1315,795.47 v2(1334.53,815) 1334.53,1315 v2(1330,1319.53) 1330,1800.47 v2(1339.53,1810) 1339.53,2044.53 1625,2330 v2(2115,2330)
GND: "5V LED.2" "-5V LED.1" BNC1.1 BNC2.1 BNC3.1 BNC4.1 C1_IG1.1 C1_IG2.1 C1_IG3.1 C1_IG4.1 C2_IG1.2 C2_IG2.2 C2_IG3.2 C2_IG4.2 C5_LP1.1 C5_LP2.1 C5_LP3.1 C5_LP4.1 C7_LP1.2 C7_LP2.2 C7_LP3.2 C7_LP4.2 C8_LP1.2 C8_LP2.2 C8_LP3.2 C8_LP4.2 C10.2 C11.1 C12.1 CH1.2 CH2.2 CH3.2 CH4.2 L1.2 POT1_LP1.1 POT1_LP2.1 POT1_LP3.1 POT1_LP4.1 POT2_LP1.3 POT2_LP2.3 POT2_LP3.3 POT2_LP4.3 Power.1 R1_IG1.1 R1_IG2.1 R1_IG3.1 R1_IG4.1 R3_IG1.1 R3_IG2.1 R3_IG3.1 R3_IG4.1 R6_LP1.1 R6_LP2.1 R6_LP3.1 R6_LP4.1 R8_LP1.1 R8_LP2.1 R8_LP3.1 R8_LP4.1 R12.1 U1_IG1.1 U1_IG1.6 U1_IG2.1 U1_IG2.6 U1_IG3.1 U1_IG3.6 U1_IG4.1 U1_IG4.6
  other v1: 360,80 480,80 600,80 720,80 840,80 960,80 1080,80 1200,80 1320,80 1440,80 1560,80 1680,80 1800,80 1920,80 2040,80 2160,80 2280,80 2400,80 2520,80 300,200 420,200 540,200 660,200 780,200 900,200 1020,200 1140,200 1260,200 1380,200 1500,200 1620,200 1740,200 1860,200 1980,200 2100,200 2220,200 2340,200 2460,200 120,320 240,320 360,320 480,320 600,320 720,320 1440,320 1560,320 1680,320 1800,320 1920,320 2040,320 2160,320 2280,320 2400,320 2520,320 2640,320 2760,320 180,440 300,440 420,440 780,440 1140,440 1500,440 1860,440 2220,440 2340,440 2460,440 120,560 240,560 360,560 480,560 840,560 2040,560 2160,560 2400,560 2520,560 2760,560 180,680 300,680 420,680 540,680 660,680 1140,680 1500,680 1620,680 1740,680 1980,680 2100,680 2220,680 2340,680 2580,680 2700,680 120,800 240,800 360,800 480,800 600,800 720,800 1440,800 1560,800 1800,800 2160,800 2280,800 2400,800 2520,800 2640,800 2760,800 180,920 300,920 420,920 660,920 1140,920 1260,920 1500,920 1740,920 2220,920 120,1040 840,1040 2040,1040 2160,1040 2520,1040 2640,1040 2760,1040 180,1160 300,1160 420,1160 540,1160 660,1160 1140,1160 1740,1160 1980,1160 2100,1160 2220,1160 2340,1160 120,1280 240,1280 360,1280 480,1280 600,1280 720,1280 840,1280 1440,1280 1560,1280 1680,1280 1800,1280 2160,1280 2280,1280 2400,1280 2520,1280 2640,1280 2760,1280 180,1400 300,1400 660,1400 1020,1400 1140,1400 1260,1400 1500,1400 1860,1400 2220,1400 120,1520 840,1520 2040,1520 2160,1520 2400,1520 2520,1520 2640,1520 2760,1520 180,1640 300,1640 540,1640 660,1640 1980,1640 2100,1640 2340,1640 120,1760 240,1760 360,1760 480,1760 600,1760 720,1760 840,1760 960,1760 1080,1760 1200,1760 1560,1760 1800,1760 2160,1760 2280,1760 2400,1760 2520,1760 2640,1760 2760,1760 180,1880 300,1880 420,1880 660,1880 1020,1880 1140,1880 1500,1880 2100,1880 2220,1880 120,2000 360,2000 840,2000 1080,2000 2160,2000 2280,2000 2640,2000 2760,2000 180,2120 300,2120 420,2120 540,2120 780,2120 1260,2120 2460,2120 120,2240 240,2240 360,2240 600,2240 720,2240 960,2240 1080,2240 1200,2240 1320,2240 1800,2240 2160,2240 2400,2240 2520,2240 2640,2240 2760,2240 660,2360 1020,2360 1140,2360 1260,2360 1380,2360 1500,2360 1620,2360 1860,2360 360,2480 600,2480 720,2480 840,2480 1320,2480 1800,2480 1920,2480 2040,2480 2280,2480 2520,2480 300,2600 660,2600 780,2600 1020,2600 1380,2600 1500,2600 1620,2600 1740,2600 1860,2600 2100,2600 2220,2600 2460,2600
IN1: BNC1.2 R1_IG1.2 U1_IG1.4 | length 507.1
  Top Layer w14: BNC1.2 467.76,516.77 R1_IG1.2 639.53,445 U1_IG1.4
IN2: BNC2.2 R1_IG2.2 U1_IG2.4 | length 500
  Top Layer w14: BNC2.2 472.76,1016.77 R1_IG2.2 639.53,950 U1_IG2.4
IN3: BNC3.2 R1_IG3.2 U1_IG3.4 | length 499
  Top Layer w14: BNC3.2 469.53,1525 R1_IG3.2 629.53,1455 U1_IG3.4
IN4: BNC4.2 R1_IG4.2 U1_IG4.4 | length 511.4
  Top Layer w14: BNC4.2 439.53,2030 R1_IG4.2 629.53,1950 U1_IG4.4
"Net5V LED_1": "5V LED.1" R15.1 | length 341.8
  Top Layer w20: 167.52,2360 325.47,2360 R15.1
"Net-5V LED_2": "-5V LED.2" R16.1 | length 109.7
  Top Layer w10: R16.1 2648.74,2340
NetC3_IG1_1: C3_IG1.1 U1_IG1.7 | length 181.9
  Top Layer w14: U1_IG1.7 950,545 980,515 980,480.47 C3_IG1.1
NetC3_IG1_2: C3_IG1.2 R3_IG1.2 R4_LP1.1 | length 234.5
  Top Layer w14: R3_IG1.2 R4_LP1.1 1079.53,485.94 C3_IG1.2
NetC3_IG2_1: C3_IG2.1 U1_IG2.7 | length 192.8
  Top Layer w14: U1_IG2.7 950,1050 965,1035 965,980.47 C3_IG2.1
NetC3_IG2_2: C3_IG2.2 R3_IG2.2 R4_LP2.1 | length 239.5
  Top Layer w14: R3_IG2.2 R4_LP2.1 1069.53,980.94 C3_IG2.2
NetC3_IG3_1: C3_IG3.1 U1_IG3.7 | length 179
  Top Layer w14: U1_IG3.7 930,1555 970,1515 970,1475.47 C3_IG3.1
NetC3_IG3_2: C3_IG3.2 R3_IG3.2 R4_LP3.1 | length 234.9
  Top Layer w14: R3_IG3.2 1005,1649.53 R4_LP3.1 1064.53,1490.47 C3_IG3.2
NetC3_IG4_1: C3_IG4.1 U1_IG4.7 | length 184.8
  Top Layer w14: U1_IG4.7 940,2050 965,2025 965,1975.47 C3_IG4.1
NetC3_IG4_2: C3_IG4.2 R3_IG4.2 R4_LP4.1 | length 229.5
  Top Layer w14: R3_IG4.2 R4_LP4.1 1005.47,2019.53 1064.53,1960.47 C3_IG4.2
NetC4_LP1_1: C4_LP1.1 C6_LP1.2 R7_LP1.2 U2_LP1.1 | length 346.7
  Top Layer w14: C4_LP1.1 1370.47,680 R7_LP1.2 ; C6_LP1.2 R7_LP1.2 ; U2_LP1.1 U2_LP1.1 R7_LP1.2
NetC4_LP1_2: C4_LP1.2 R4_LP1.2 R5_LP1.1 | length 357.9
  Top Layer w14: R4_LP1.2 R4_LP1.2@1080.47,545 ; R5_LP1.1 1140.47,545 R4_LP1.2@1080.47,545 ; C4_LP1.2 R4_LP1.2@1080.47,545
NetC4_LP2_1: C4_LP2.1 C6_LP2.2 R7_LP2.2 U2_LP2.1 | length 341.6
  Top Layer w14: C4_LP2.1 1380.47,1175 R7_LP2.2 ; U2_LP2.1 1425.47,1054.96 R7_LP2.2 ; C6_LP2.2 R7_LP2.2
NetC4_LP2_2: C4_LP2.2 R4_LP2.2 R5_LP2.1 | length 398.9
  Top Layer w14: R5_LP2.1 1150.47,1040 R4_LP2.2 1204.53,1175 C4_LP2.2
NetC4_LP3_1: C4_LP3.1 C6_LP3.2 R7_LP3.2 U2_LP3.1 | length 314.2
  Top Layer w14: C4_LP3.1 1395.47,1655 R7_LP3.2 ; C6_LP3.2 R7_LP3.2 ; U2_LP3.1 U2_LP3.1 R7_LP3.2
NetC4_LP3_2: C4_LP3.2 R4_LP3.2 R5_LP3.1 | length 413.6
  Top Layer w14: R5_LP3.1 1140.47,1550 R4_LP3.2 1169.06,1655 C4_LP3.2
NetC4_LP4_1: C4_LP4.1 C6_LP4.2 R7_LP4.2 U2_LP4.1 | length 329.6
  Top Layer w14: C4_LP4.1 1370.47,2170 R7_LP4.2 ; C6_LP4.2 R7_LP4.2 ; U2_LP4.1 U2_LP4.1 R7_LP4.2
NetC4_LP4_2: C4_LP4.2 R4_LP4.2 R5_LP4.1 | length 418.9
  Top Layer w14: R5_LP4.1 1150.47,2040 R4_LP4.2 1194.53,2170 C4_LP4.2
NetC5_LP1_2: C5_LP1.2 R5_LP1.2 U2_LP1.3 | length 259.3
  Top Layer w14: C5_LP1.2 R5_LP1.2 1294.53,450 U2_LP1.3
NetC5_LP2_2: C5_LP2.2 R5_LP2.2 U2_LP2.3 | length 247.2
  Top Layer w14: C5_LP2.2 R5_LP2.2 1299.53,950 U2_LP2.3
NetC5_LP3_2: C5_LP3.2 R5_LP3.2 U2_LP3.3 | length 228.1
  Top Layer w14: C5_LP3.2 R5_LP3.2 1294.53,1455 U2_LP3.3
NetC5_LP4_2: C5_LP4.2 R5_LP4.2 U2_LP4.3 | length 237.2
  Top Layer w14: C5_LP4.2 R5_LP4.2 1304.53,1945 U2_LP4.3
NetC6_LP1_1: C6_LP1.1 POT1_LP1.3 R8_LP1.2 R9_LP1.2 | length 1143.9
  Top Layer w14: C6_LP1.1 R8_LP1.2 1605.47,785.47 1635,815 v2(1703.43,815) ; R9_LP1.2 2089.53,428.9 POT1_LP1.3
  Bottom Layer w14: v2(1703.43,815) 1703.43,611.57 1800,515 2003.43,515 POT1_LP1.3
NetC6_LP2_1: C6_LP2.1 POT1_LP2.3 R8_LP2.2 R9_LP2.2 | length 1132.5
  Top Layer w14: C6_LP2.1 R8_LP2.2 1620.47,1280.47 1655,1315 v2(1706.85,1315) ; R9_LP2.2 2089.53,932.32 POT1_LP2.3
  Bottom Layer w14: v2(1706.85,1315) 1706.85,1093.15 1795,1005 2016.85,1005 POT1_LP2.3
NetC6_LP3_1: C6_LP3.1 POT1_LP3.3 R8_LP3.2 R9_LP3.2 | length 1138.2
  Top Layer w14: C6_LP3.1 R8_LP3.2 1605.47,1795.47 1623.43,1813.43 v2(1705,1813.43) ; POT1_LP3.3 2089.53,1431.1 R9_LP3.2
  Bottom Layer w10: 2008.43,1510 POT1_LP3.3
  Bottom Layer w14: v2(1705,1813.43) 1705,1605 1800,1510 2008.43,1510
NetC6_LP4_1: C6_LP4.1 POT1_LP4.3 R8_LP4.2 R9_LP4.2 | length 1103.1
  Top Layer w10: POT1_LP4.3 2089.06,1925.63 R9_LP4.2
  Top Layer w14: C6_LP4.1 R8_LP4.2 1615.47,2260.47 1645,2290 1723.43,2290 v2(1738.43,2275)
  Bottom Layer w14: v2(1738.43,2275) 1738.43,2061.57 1805,1995 2018.43,1995 POT1_LP4.3
NetC9_LP1_2: C9_LP1.2 R10_LP1.1 U2_LP1.7 | length 506
  Top Layer w14: U2_LP1.7 1785,500 1860,575 C9_LP1.2 1925.94,670.47 R10_LP1.1
NetC9_LP2_2: C9_LP2.2 R10_LP2.1 U2_LP2.7 | length 498.9
  Top Layer w14: U2_LP2.7 1790,1000 1855,1065 C9_LP2.2 1920.94,1155.47 R10_LP2.1
NetC9_LP3_2: C9_LP3.2 R10_LP3.1 U2_LP3.7 | length 490.5
  Top Layer w14: U2_LP3.7 1785,1505 1865,1585 C9_LP3.2 1895.94,1645.47 R10_LP3.1
NetC9_LP4_2: C9_LP4.2 R10_LP4.1 U2_LP4.7 | length 501.8
  Top Layer w14: U2_LP4.7 1785,1995 1865,2075 C9_LP4.2 1940.94,2165.47 R10_LP4.1
NetC11_2: C11.2 CT.2 D1.1 L2.1 R11.2 U1.4 | length 786.5
  Top Layer w10: R11.2 1457.28,2567.24 U1.4
  Top Layer w14: U1.4 1457.76,2549.52 CT.2 1662.72,2549.52 D1.1 ; L2.1 D1.1 ; C11.2 1930.19,2547.23 D1.1
NetCT_1: CT.1 U1.3 | length 121.7
  Top Layer w14: U1.3 1565.47,2499.99 CT.1
NetD1_2: D1.2 L1.1 U1.2 | length 301.6
  Top Layer w14: U1.2 1662.24,2449.99 D1.2 L1.1
NetPOT1_LP1_2: POT1_LP1.2 U2_LP1.5 | length 433.1
  Top Layer w14: U2_LP1.5 1705,400 1750,355 1925,355 POT1_LP1.2
NetPOT1_LP2_2: POT1_LP2.2 U2_LP2.5 | length 429.5
  Top Layer w14: U2_LP2.5 1725,900 1765,860 1923.43,860 POT1_LP2.2
NetPOT1_LP3_2: POT1_LP3.2 U2_LP3.5 | length 429
  Top Layer w14: U2_LP3.5 1750,1405 1790,1365 1925,1365 POT1_LP3.2
NetPOT1_LP4_2: POT1_LP4.2 U2_LP4.5 | length 418.6
  Top Layer w14: U2_LP4.5 1715,1895 1740,1870 1935,1870 POT1_LP4.2
NetR2_IG1_1: R2_IG1.1 U1_IG1.3 | length 102.9
  Top Layer w14: R2_IG1.1 585.47,495 U1_IG1.3
NetR2_IG1_2: R2_IG1.2 U1_IG1.2 | length 106.7
  Top Layer w14: R2_IG1.2 594.53,545 U1_IG1.2
NetR2_IG2_1: R2_IG2.1 U1_IG2.3 | length 102.9
  Top Layer w14: R2_IG2.1 580.47,1000 U1_IG2.3
NetR2_IG2_2: R2_IG2.2 U1_IG2.2 | length 106.7
  Top Layer w14: R2_IG2.2 589.53,1050 U1_IG2.2
NetR2_IG3_1: R2_IG3.1 U1_IG3.3 | length 107.9
  Top Layer w14: R2_IG3.1 575.47,1505 U1_IG3.3
NetR2_IG3_2: R2_IG3.2 U1_IG3.2 | length 111.7
  Top Layer w14: R2_IG3.2 584.53,1555 U1_IG3.2
NetR2_IG4_1: R2_IG4.1 U1_IG4.3 | length 107.9
  Top Layer w14: R2_IG4.1 575.47,2000 U1_IG4.3
NetR2_IG4_2: R2_IG4.2 U1_IG4.2 | length 111.7
  Top Layer w14: R2_IG4.2 584.53,2050 U1_IG4.2
NetR6_LP1_2: R6_LP1.2 R7_LP1.1 U2_LP1.2 | length 350.5
  Top Layer w14: U2_LP1.2 1490,500 1515,525 1515,594.53 R7_LP1.1 R6_LP1.2
NetR6_LP2_2: R6_LP2.2 R7_LP2.1 U2_LP2.2 | length 352.6
  Top Layer w14: U2_LP2.2 1480,1000 1515,1035 1515,1099.53 R7_LP2.1 R6_LP2.2
NetR6_LP3_2: R6_LP3.2 R7_LP3.1 U2_LP3.2 | length 361.3
  Top Layer w14: U2_LP3.2 1495,1505 1510,1520 1510,1580 1474.53,1615.47 R7_LP3.1 R6_LP3.2
NetR6_LP4_2: R6_LP4.2 R7_LP4.1 U2_LP4.2 | length 358.4
  Top Layer w14: U2_LP4.2 1480,1995 1505,2020 1505,2094.53 R7_LP4.1 R6_LP4.2
NetR9_LP1_1: R9_LP1.1 R10_LP1.2 U2_LP1.6 | length 595.6
  Top Layer w14: U2_LP1.6 1810,450 1965,605 R9_LP1.1 2030.47,714.06 R10_LP1.2
NetR9_LP2_1: R9_LP2.1 R10_LP2.2 U2_LP2.6 | length 588.5
  Top Layer w14: U2_LP2.6 1810,950 1960,1100 R9_LP2.1 2030.47,1204.06 R10_LP2.2
NetR9_LP3_1: R9_LP3.1 R10_LP3.2 U2_LP3.6 | length 603.5
  Top Layer w14: U2_LP3.6 1810,1455 1960,1605 R9_LP3.1 2030.47,1719.06 R10_LP3.2
NetR9_LP4_1: R9_LP4.1 R10_LP4.2 U2_LP4.6 | length 587.8
  Top Layer w14: U2_LP4.6 1815,1945 1965,2095 R9_LP4.1 2030,2194.53 R10_LP4.2
NetR11_1: R11.1 R14.2 U1.5 | length 165.8
  Top Layer w10: U1.5 1254.53,2561.8 R14.2 R11.1
NetR12_2: R12.2 R13.1 | length 60
  Top Layer w10: R12.2@1085.47,2595 R13.1
NetR13_2: R13.2 R14.1 | length 50.9
  Top Layer w10: R13.2 R14.1
NetRsc_2: Rsc.2 U1.1 U1.7 U1.8 | length 366.2
  Top Layer w14: Rsc.2 1154.52,2449.99 U1.7 U1.8 U1.1
OUT1: C9_LP1.1 CH1.1 POT2_LP1.2 | length 954.9
  Top Layer w14: C9_LP1.1 1915.47,785 2045,785 POT2_LP1.2 2563.15,495 CH1.1
OUT2: C9_LP2.1 CH2.1 POT2_LP2.2 | length 955.8
  Top Layer w14: C9_LP2.1 1915.47,1275 2065,1275 POT2_LP2.2 2563.15,1000 CH2.1
OUT3: C9_LP3.1 CH3.1 POT2_LP3.2 | length 957.4
  Top Layer w14: C9_LP3.1 1945.47,1785 2050,1785 POT2_LP3.2 2553.15,1495 CH3.1
OUT4: C9_LP4.1 CH4.1 POT2_LP4.2 | length 926.3
  Top Layer w10: C9_LP4.1 1900.47,2260 2075,2260
  Top Layer w14: 2075,2260 POT2_LP4.2 2558.15,1995 CH4.1

## Polygon pours and split planes (outlines as drawn)
GND on Bottom Layer "GND_L02_P008" (solid, pour order 8): 0,0 2835,0 2835,2755.91 0,2755.91
GND on Top Layer "GND_L01_P007" (solid, pour order 7): 0,0 2835,0 2835,2755.91 0,2755.91

## Keep-outs
Keep-Out Layer:
  the board outline again, w10

## Silkscreen, mask and mechanical layers (free items; w line width, h text height)
Top Overlay:
  drawing of 1446 lines, arcs and shapes, not listed
  text "GND" at 295,2650 h30 r270
  text "+5V" at 290,2455 h30 r270
  text "GND" at 2810,2105 h30 r90
  text "SIG" at 2810,1885 h30 r90
  text "GND" at 2810,1585 h30 r90
  text "SIG" at 2805,1365 h30 r90
  text "GND" at 2810,1080 h30 r90
  text "SIG" at 2810,885 h30 r90
  text "GND" at 2810,575 h30 r90
  text "SIG" at 2810,375 h30 r90
  text "Gain" at 1890,250 h90
  text "Hydrophone Preamplifier" at 915,230 h60
  text "DC" at 2285,220 h90
  text "regulation" at 1800,175 h90
  text "Arek Strzała" at 915,155 h60
  text "Offset" at 2230,140 h90
  text "0-100%" at 1830,80 h90
  text "9.01.2021" at 915,75 h60
Bottom Overlay:
  text "R2 - Rezystor ustawiajacy wzmocnienie wzmacniacza instrumentalnego" at 2160,2115 h60
  text "Gain = 1+(9.9k)/R2" at 2165,2055 h60

## Dimensions
2834.65,2755.91 to 2834.65,0 on Mechanical 13
0,2755.91 to 2834.65,2755.91 on Mechanical 13